# Altium PCB PCB CO_Dhani.PcbDoc
Units mil, origin at the board's own origin, x right, y up, seen from the top; angles counter-clockwise.
Board outline 6000 x 5500 mil, 2 copper layers (TopLayer, BottomLayer); 30 components, 0 nets, 266 pads, 0 vias.
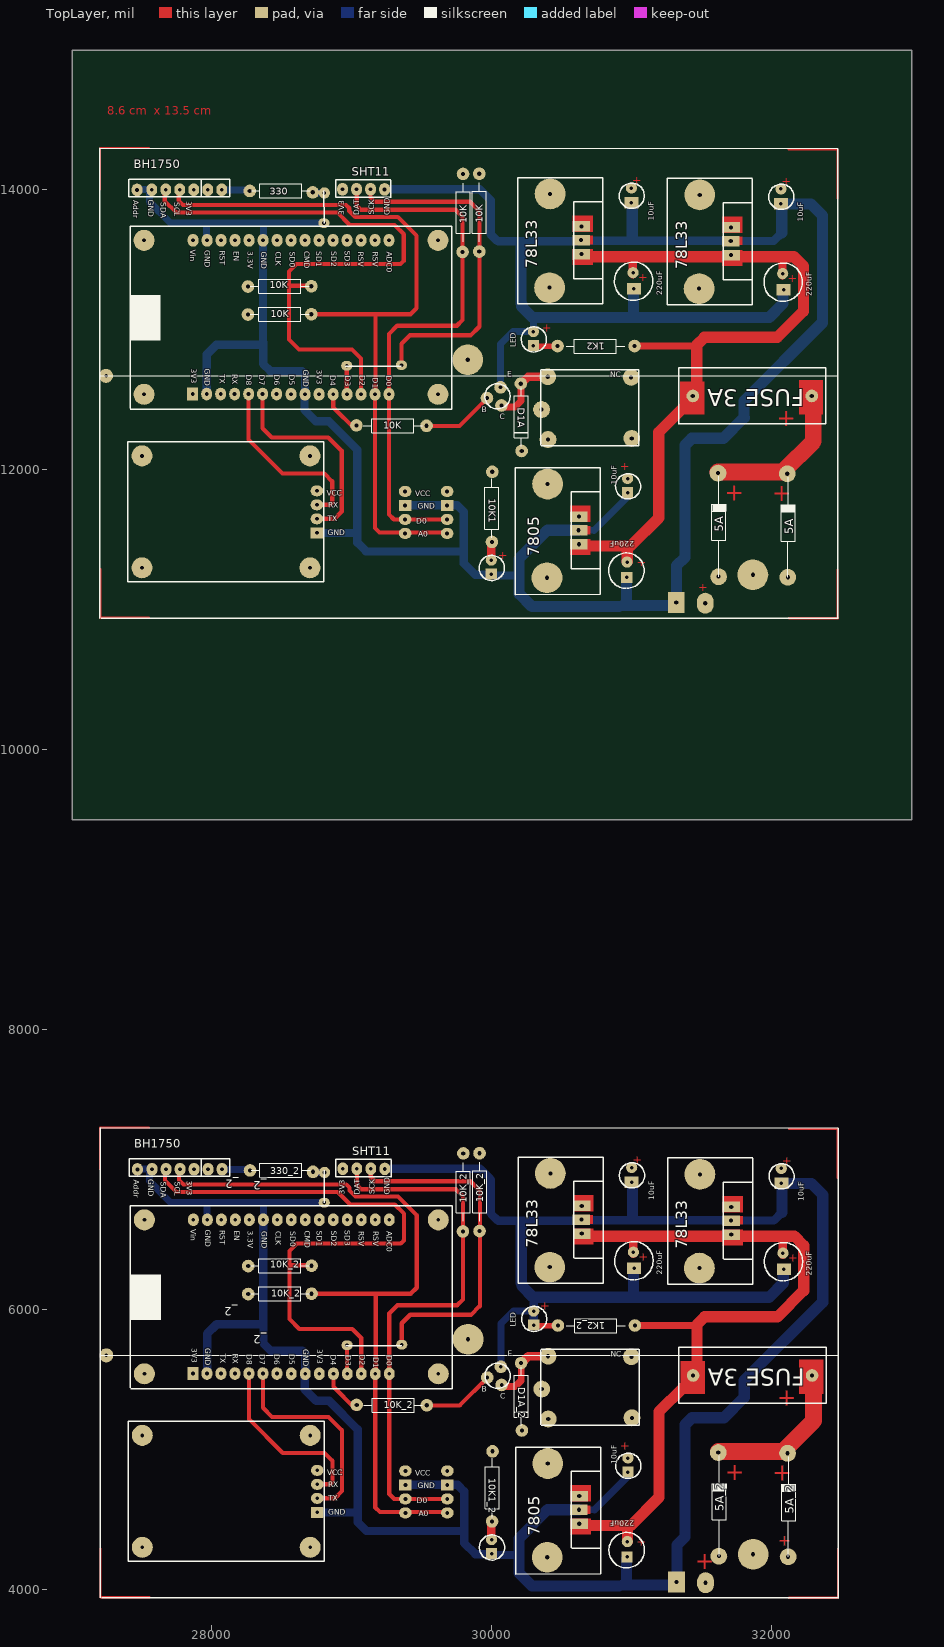
[diagram p0: TopLayer view]
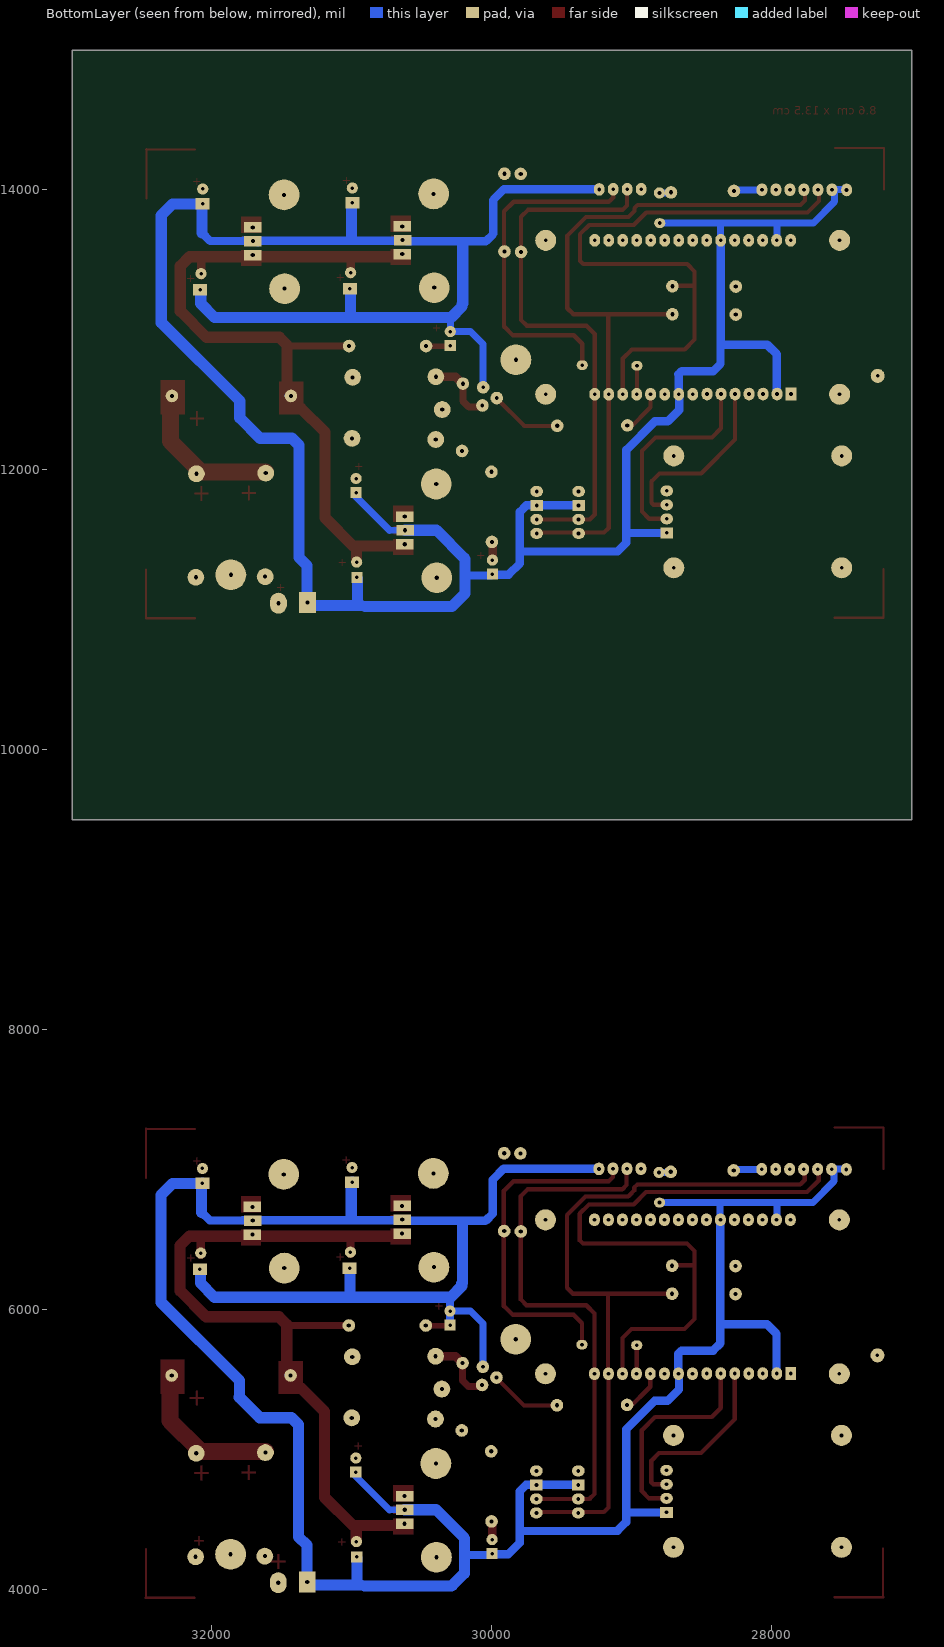
[diagram p1: BottomLayer view, seen from below]

## Layer stack, top to bottom
TopSolder: solder mask 0.4, Solder Resist, Dk 3.5
TopLayer: signal copper 1.4
Dielectric1: dielectric 12.6, FR-4, Dk 4.8
BottomLayer: signal copper 1.4
BottomSolder: solder mask 0.4, Solder Resist, Dk 3.5

## Board outline
27000,15000 33000,15000 33000,9500 27000,9500

## Design rules (kind name [scope] priority, off if disabled: settings)
Clearance [All] p1: gap=25
FabricationTestPointUsage TestPointUsage [All] p1: valid=0 allowmultiple=FALSE
FabricationTestpoint Testpoint [All] p1: side=3 testpointundercomponent=TRUE minsize=40 maxsize=100 preferedsize=60 minholesize=20 maxholesize=40 preferedholesize=32 testpointgrid=1 allowsidetop=TRUE allowsidebottom=TRUE usegrid=TRUE gridtolerance=0.01
PolygonConnect [All] p1: connectstyle=Relief reliefconductorwidth=10 reliefentries=4 polygonreliefangle="90 Angle" airgapwidth=10
RoutingVias [All] p1: holewidth=28 width=50 viastyle="Through Hole" minholewidth=28 minwidth=50 maxholewidth=28 maxwidth=50
ShortCircuit [All] p1: allowed=TRUE
SilkToSolderMaskClearance SilkscreenOverComponentPads [IsPad] p1: minsilkscreentomaskgap=10 clearancetoexposedcopper=TRUE
SolderMaskExpansion [All] p1: expansion=4
Width [All] p1: maxlimit=10 minlimit=10 preferedwidth=10
26 further rules are at their usual default settings.

## Components (designator, comment, footprint, x,y, rotation, side; value= is the part's Value field where it differs from the comment)
1K2 "Comment" AXIAL-0.5#1 30740,12885 r180 top
1K2_2 "Comment" AXIAL-0.5#1 30742,5886 r180 top
5A "Comment" DIODE-0.4 31623,11626 r90 top
5A "Comment" DIODE-0.4 32118,11621 r90 top
5A_2 "Comment" DIODE-0.4 32120,4622 r90 top
5A_2 "Comment" DIODE-0.4 31625,4627 r90 top
10K "Comment" AXIAL-0.5#2 29292,12315 r0 top
10K "Comment" AXIAL-0.5#3 29910,13840 r90 top
10K "Comment" AXIAL-0.5#4 29794,13839 r90 top
10K "Comment" AXIAL-0.5#5 28484,13112 r0 top
10K "Comment" AXIAL-0.5#5 28484,13312 r0 top
10K1 "Comment" AXIAL-0.5#2 30000,11726 r270 top
10K1_2 "Comment" AXIAL-0.5#2 30002,4727 r270 top
10K_2 "Comment" AXIAL-0.5#5 28486,6313 r0 top
10K_2 "Comment" AXIAL-0.5#5 28486,6113 r0 top
10K_2 "Comment" AXIAL-0.5#4 29796,6840 r90 top
10K_2 "Comment" AXIAL-0.5#3 29912,6841 r90 top
10K_2 "Comment" AXIAL-0.5#2 29294,5316 r0 top
330 "Comment" AXIAL-0.5#6 28490,13993 r0 top
330_2 "Comment" AXIAL-0.5#6 28492,6994 r0 top
_2 "" SIP8#1 28220,5722 r0 top
_2 "" SIP8#1 28224,6635 r0 top
_2 "" SIP8#2 28427,6621 r0 top
_2 "" SIP8#3 28424,5523 r0 top
D1A "Comment" AXIAL-0.5#7 30209,12378 r270 top
D1A_2 "Comment" AXIAL-0.5#7 30211,5379 r270 top
? "" SIP8#3 28422,12522 r0 top
? "" SIP8#2 28425,13620 r0 top
? "" SIP8#1 28222,13634 r0 top
? "" SIP8#1 28218,12721 r0 top

## Footprints (in the part's own frame and the unit in brackets; to place one, negate y for a bottom-side part, rotate by r counter-clockwise, add the part's x,y. Pads: shape width x height; smd on the part's side, far side on the other; paste and mask are expansions set on the pad)
AXIAL-0.5#1 [mil]
  round 90 hole 30: 1(-280,0) 2(270,0)
  silkscreen extent -210,-50 210,50
AXIAL-0.5#2 [mil]
  round 90 hole 30: 1(-260,3) 2(241,0)
  silkscreen extent -210,-50 210,50
AXIAL-0.5#3 [mil]
  round 90 hole 30: 1(-280,0) 2(276,0)
  silkscreen extent -210,-50 210,50
AXIAL-0.5#4 [mil]
  round 90 hole 30: 1(-282,3) 2(276,0)
  silkscreen extent -210,-50 210,50
AXIAL-0.5#5 [mil]
  round 90 hole 30: 1(-227,-2) 2(226,0)
  silkscreen extent -210,-50 210,50
AXIAL-0.5#6 [mil]
  round 90 hole 30: 1(-220,0) 2(230,-10)
  silkscreen extent -210,-50 210,50
AXIAL-0.5#7 [mil]
  round 90 hole 30: 1(-238,-2) 2(243,4)
  silkscreen extent -210,-50 210,50
DIODE-0.4 [mil]
  round 120 hole 30: 1(-389,3) 2(351,7)
  silkscreen extent -389,-50 327,50
SIP8#1 [mil]
SIP8#2 [mil]
  oval 77.5x90 hole 27: 1(840,20) 2(140,20) 3(240,20) 4(340,20) 5(440,20) 6(540,20) 7(640,20) 8(740,20)
SIP8#3 [mil]
  oval 77.5x90 hole 27: 1(843,18) 2(143,18) 3(243,18) 4(343,18) 6(543,18) 7(643,18) 8(743,18)

## Free pads (board coordinates)
  oval 77.5x90 hole 27: 0(27465,14000) 0(27467,7001) 0(27570,14002) 0(27572,7003) 0(27670,14002) 0(27672,7003) 0(27770,14002) 0(27772,7003) 0(27865,13640) 0(27867,6641) 0(27870,14002) 0(27872,7003) 0(27962,12542) 0(27964,5543) 0(27965,13640) 0(27967,6641) 0(27970,14001) 0(27972,7002) 0(28062,12542) 0(28064,5543) 0(28065,13640) 0(28067,6641) 0(28070,14001) 0(28072,7002) 0(28162,12542) 0(28164,5543) 0(28165,13640) 0(28167,6641) 0(28262,12542) 0(28264,5543) 0(28265,13640) 0(28267,6641) 0(28362,12542) 0(28364,5543) 0(28365,13640) 0(28367,6641) 0(28462,12542) 0(28464,5543) 0(28465,13640) 0(28467,6641) 0(28866,12540) 0(28868,5541) 0(28933,14005) 0(28935,7006) 0(29033,14005) 0(29035,7006) 0(29133,14005) 0(29135,7006) 0(29233,14004) 0(29235,7005)
  round 150 hole 27: 0(27500,11300) 0(27500,12100) 0(27502,4301) 0(27502,5101) 0(27515,12540) 0(27515,13640) 0(27517,5541) 0(27517,6641) 0(28700,11300) 0(28700,12100) 0(28702,4301) 0(28702,5101) 0(29615,12540) 0(29615,13640) 0(29617,5541) 0(29617,6641)
  rect 77.5x90 hole 27: 0(27862,12542) 0(27864,5543)
  rect 90x77.5 hole 27: 0(28750,11550) 0(28752,4551) 0(29380,11746) 0(29382,4747) 0(29680,11746) 0(29682,4747)
  oval 90x77.5 hole 27: 0(28750,11650) 0(28750,11750) 0(28750,11850) 0(28752,4651) 0(28752,4751) 0(28752,4851) 0(29380,11546) 0(29380,11646) 0(29380,11846) 0(29382,4547) 0(29382,4647) 0(29382,4847) 0(29680,11546) 0(29680,11646) 0(29680,11846) 0(29682,4547) 0(29682,4647) 0(29682,4847)
  oval 80x70 hole 27: 0(28800,13763) 0(28802,6764) 0(28963,12744) 0(28965,5745) 0(29354,12748) 0(29356,5749)
  round 80 hole 27: 0(28803,13979) 0(28805,6980)
  round 220 hole 30: 0(29828,12787) 0(29830,5788) 0(30394,11229) 0(30396,4230) 0(30398,11899) 0(30400,4900) 0(30412,13302) 0(30414,6303) 0(30416,13972) 0(30418,6973) 0(31481,13295) 0(31483,6296) 0(31485,13965) 0(31487,6966) 0(31865,11250) 0(31867,4251)
  round 90 hole 27: 0(29965,12513) 0(29967,5514) 0(30062,12590) 0(30064,5591) 0(30068,12460) 0(30070,5461)
  rect 80x80 hole 25: 0(29996,11255) 0(29998,4256) 0(30297,12888) 0(30299,5889) 0(30964,11231) 0(30966,4232) 0(30970,11838) 0(30972,4839)
  round 120 hole 30: 0(30355,12431) 0(30357,5432) 0(30400,12666) 0(30401,12217) 0(30402,5667) 0(30403,5218) 0(30995,12661) 0(30997,5662) 0(30999,12225) 0(31001,5226)
  rect 100x80 hole 25: 0(30997,13908) 0(30999,6909) 0(31015,13294) 0(31017,6295) 0(32066,13901) 0(32068,6902) 0(32084,13287) 0(32086,6288)
  rect 120x150 hole 30: 0(31317,11053) 0(31319,4054)
  oval 120x150 hole 30: 0(31525,11047) 0(31527,4048)
  round 100 hole 25: 1(27243,12672) 1(27245,5673)
  round 80 hole 25: 1(29996,11355) 1(29998,4356) 1(30297,12988) 1(30299,5989) 1(30966,11341) 1(30968,4342) 1(30970,11938) 1(30972,4939) 1(30997,14014) 1(30999,7015) 1(31009,13409) 1(31011,6410) 1(32066,14007) 1(32068,7008) 1(32078,13402) 1(32080,6403)
  rect 125x75 hole 30: 1(30622,11469) 1(30624,4470) 1(30640,13542) 1(30642,6543) 1(31709,13535) 1(31711,6536) 2(30620,11569) 2(30622,4570) 2(30638,13642) 2(30640,6643) 2(31707,13635) 2(31709,6636) 3(30622,11666) 3(30624,4667) 3(30640,13739) 3(30642,6740) 3(31709,13732) 3(31711,6733)
  round 90 hole 30: 8(32286,12528) 8(32288,5529) 9(31436,12528) 9(31438,5529)

## Nets (pads, with @x,y where several pads share a name; then routed paths per layer and width w, separated by ;. In a path a pad name is that pad's centre, name@x,y a point inside that pad or via, vN(x,y) a via of type N, cw(c..) or ccw(c..) an arc to the next point about the centre after c; other vN are vias at no path point)
pads on no net: 1K2.1 1K2.2 1K2_2.1 1K2_2.2 5A.1 5A.2 5A_2.1 5A_2.2 10K1.1 10K1.2 10K1_2.1 10K1_2.2 10K.1 10K.2 10K_2.1 10K_2.2 330.1 330.2 330_2.1 330_2.2 ?.1 ?.2 ?.3 ?.4 ?.5 ?.6 ?.7 ?.8 _2.1 _2.2 _2.3 _2.4 _2.5 _2.6 _2.7 _2.8 D1A.1 D1A.2 D1A_2.1 D1A_2.2
copper on no net: | length 102412
  TopLayer w15: 27199,14002 27199,14299 27549,14299 ; 27201,7003 27201,7300 27551,7300 ; 27201,10943 27551,10943 ; 27202,10941 27202,11291 ; 27203,3944 27553,3944 ; 27204,3942 27204,4292 ; 32120,14289 32470,14289 ; 32122,7290 32472,7290 ; 32122,10940 32472,10940 ; 32124,3941 32474,3941 ; 32469,13941 32469,14291 ; 32470,10939 32470,11289 ; 32471,6942 32471,7292 ; 32472,3940 32472,4290
  TopLayer w30: 27662,14002 27662,13922 27745.37,13838.63 ; 27664,7003 27664,6923 27747.37,6839.63 ; 27745.74,13839 28020,13839 ; 27747.74,6840 28022,6840 ; 27762,14002 27762,13925 27790.55,13896.45 27794,13893 27973.5,13893 ; 27764,7003 27764,6926 27792.55,6897.45 27796,6894 27975.5,6894 ; 27961,13893 28958,13893 28981,13870 28981,13849 29016.98,13813.02 ; 27963,6894 28960,6894 28983,6871 28983,6850 29018.98,6814.02 ; 27965,13640 27970,13645 ; 27967,6641 27972,6646 ; 28004,13839 28897,13839 ; 28006,6840 28899,6840 ; 28262,12542 28262,12216 28504,11974 28803,11974 28859,11918 28859,11765 28844,11750 28750,11750 ; 28264,5543 28264,5217 28506,4975 28805,4975 28861,4919 28861,4766 28846,4751 28752,4751 ; 28362,12542 28362,12297 28427,12232 28831,12232 28927,12136 28927,11702 28875,11650 28750,11650 ; 28364,5543 28364,5298 28429,5233 28833,5233 28929,5137 28929,4703 28877,4651 28752,4651 ; 28554,13315 28699,13315 ; 28556,6316 28701,6316 ; 28710,13112 29418,13112 29461,13155 29461,13673.5 ; 28712,6113 29420,6113 29463,6156 29463,6674.5 ; 28866,12540 28866,12447 29021,12292 ; 28868,5541 28868,5448 29023,5293 ; 28897,13838 28983.5,13751.5 28985,13750 29304,13750 29370,13684 29370,13492 ; 28899,6839 28985.5,6752.5 28987,6751 29306,6751 29372,6685 29372,6493 ; 28963,12530 28963,12744 ; 28965,5531 28965,5745 ; 29002.25,13827.75 29024,13806 29328,13806 29460.5,13673.5 ; 29004.25,6828.75 29026,6807 29330,6807 29462.5,6674.5 ; 29035,13995 29035,13889 29066,13858 29374,13858 29742,13858 29791,13809 29791,13719 29791,13071 29749.4,13029.4 ; 29037,6996 29037,6890 29068,6859 29376,6859 29744,6859 29793,6810 29793,6720 29793,6072 29751.4,6030.4 ; 29065,12540 29065,12795 29000,12860 28622,12860 28551,12931 28551,13417 28604,13470 29347,13470 29369,13492 ; 29067,5541 29067,5796 29002,5861 28624,5861 28553,5932 28553,6418 28606,6471 29349,6471 29371,6493 ; 29133,14006 29133,13947 29158,13922 ; 29135,7007 29135,6948 29160,6923 ; 29165,12540 29165,11585 29198,11552 29700,11552 ; 29165,13916 29803,13916 ; 29167,5541 29167,4586 29200,4553 29702,4553 ; 29167,6917 29805,6917 ; 29168,12540 29168,13112 ; 29170,5541 29170,6113 ; 29299,11646 29680,11646 ; 29299,11647 29265,11681 29265,12540 29265,12971 29323.4,13029.4 29331,13029.4 29750,13029.4 ; 29301,4647 29682,4647 ; 29301,4648 29267,4682 29267,5541 29267,5972 29325.4,6030.4 29333,6030.4 29752,6030.4 ; 29354,12748 29354,12901 29415,12962 29848,12962 ; 29356,5749 29356,5902 29417,5963 29850,5963 ; 29529,12299 29543,12313 29768,12313 29965,12510 ; 29531,5300 29545,5314 29770,5314 29967,5511 ; 29681,13916 29787,13916 ; 29683,6917 29789,6917 ; 29774,13916 29844,13916 29912.47,13847.53 29912.47,13023 ; 29776,6917 29846,6917 29914.47,6848.53 29914.47,6024 ; 29848,12961 29910,13023 ; 29850,5962 29912,6024 ; 30649,11461 30650,11460 ; 30651,4462 30652,4461 ; 30667,13534 30668,13533 ; 30669,6535 30670,6534 ; 30960,11359 30978,11341 ; 30962,4360 30980,4342 ; 31736,13527 31737,13526 ; 31738,6528 31739,6527
  TopLayer w40: 30295,12882 30470,12882 ; 30297,5883 30472,5883 ; 32234,12518.13 32302,12518.13 ; 32236,5519.13 32304,5519.13
  TopLayer w50: 30055,12449 30165,12449 30208,12492 30208,12623 ; 30057,5450 30167,5450 30210,5493 30210,5624 ; 30622,11666 30678,11666 ; 30624,4667 30680,4667 ; 31020,12885 31462,12885 ; 31022,5886 31464,5886
  TopLayer w60: 29995,11364 29995,11472 ; 29997,4365 29997,4473 ; 30208,12615 30258,12665 30416,12665 ; 30210,5616 30260,5666 30418,5666 ; 31008,13397 31008,13523 ; 31010,6398 31010,6524 ; 32077,13390 32077,13516 ; 32079,6391 32079,6517
  TopLayer w80: 30638,11456 30991,11456 31193,11658 31193,12269 31366,12442 ; 30640,4457 30993,4457 31195,4659 31195,5270 31368,5443 ; 30648,13523 32159,13523 32226,13456 32226,13134 32039,12947 31518,12947 31464,12893 31464,12499 ; 30650,6524 32161,6524 32228,6457 32228,6135 32041,5948 31520,5948 31466,5894 31466,5500 ; 30967,11347 30967,11438 ; 30969,4348 30969,4439
  TopLayer w120: 31616,11984 32084,11984 ; 31618,4985 32086,4985 ; 32084,11991 32297,12204 32297,12527 ; 32086,4992 32299,5205 32299,5528
  BottomLayer w40: 29995.46,11255.54 30006,11245 ; 29997.46,4256.54 30008,4246 ; 30298.46,5889.54 30299,5889 ; 30969.46,11838.54 30970,11838 ; 30971.46,4839.54 30972,4839 ; 31445,12513.13 31460.87,12529 ; 31447,5514.13 31462.87,5530
  BottomLayer w50: 27489,14003 27559,14003 ; 27491,7004 27561,7004 ; 27552,13993 27552,13916 27703,13765 28113,13765 ; 27554,6994 27554,6917 27705,6766 28115,6766 ; 27962,13648 27962,13739 ; 27964,6649 27964,6740 ; 28070,13998 28259,13998 ; 28072,6999 28261,6999 ; 28072,13765 28798,13765 ; 28074,6766 28800,6766 ; 28367,13660 28367,13758 ; 28369,6661 28369,6759 ; 28712,13979 28803,13979 ; 28714,6980 28805,6980 ; 30062,12590 30062,12898 30152,12988 30297,12988 30297,13096 ; 30064,5591 30064,5899 30154,5989 30299,5989 ; 30620,11569 30731,11568 ; 30622,4570 30733,4569 ; 30737,11574 30976,11813 ; 30739,4575 30978,4814
  BottomLayer w60: 27964,12555 27964,12826 28032,12894 28365,12894 28365,13640 ; 27966,5556 27966,5827 28034,5895 28367,5895 28367,6641 ; 28366,12913 28366,12757 28417,12706 28643,12706 28667,12682 ; 28368,5914 28368,5758 28419,5707 28645,5707 28669,5683 ; 28661,12541 28661,12428 28743,12346 28836,12346 29039,12143 29039,11480 29100,11419 ; 28663,5542 28663,5429 28745,5347 28838,5347 29041,5144 29041,4481 29102,4420 ; 28665,12540 28665,12681 ; 28667,5541 28667,5682 ; 28750,11550 29032.98,11549.1 ; 28752,4551 29034.98,4550.1 ; 29099.83,11418.2 29790,11416 ; 29101.83,4419.2 29792,4417 ; 29244,14006 29913,14006 29987.5,13931.5 ; 29246,7007 29915,7007 29989.5,6932.5 ; 29380,11746 29746,11746 29754,11746 29800,11700 29800,11331 29880,11251 30000,11251 ; 29382,4747 29748,4747 29756,4747 29802,4701 29802,4332 29882,4252 30002,4252 ; 29991,13689 29991,13926 ; 29992,13683 30038,13637 30041,13637 30045,13633 30213,13633 ; 29993,6690 29993,6927 ; 29994,6684 30040,6638 30043,6638 30047,6634 30215,6634 ; 30006,11245 30193,11245 30203,11255 ; 30008,4246 30195,4246 30205,4256 ; 30210,13633 30608,13633 ; 30212,6634 30610,6634 ; 30297,12888 30306,12897 ; 30299,5901 30299,6068 ; 30613,13638 31776,13638 ; 30615,6639 31778,6639 ; 31672,13626 31681,13635 32013,13635 32072,13694 ; 31674,6627 31683,6636 32015,6636 32074,6695
  BottomLayer w80: 30193,11116 30193,11362 30198,11367 30198,11371 30389,11562 ; 30195,4117 30195,4363 30200,4368 30200,4372 30391,4563 ; 30196,11112 30281.5,11026.5 30283.5,11026.5 30287,11023 30907,11023 ; 30198,4113 30283.5,4027.5 30285.5,4027.5 30289,4024 30909,4024 ; 30208,13615 30208,13189 30213,13184 30213,13167 30290,13090 ; 30210,6616 30210,6190 30215,6185 30215,6168 30292,6091 ; 30306,13087 31982,13090 32080,13188 32080,13282 ; 30312,6088 31981,6088 ; 30398,11569 30620,11569 ; 30400,4570 30622,4570 ; 30933,11030 31307,11030 ; 30935,4031 31309,4031 ; 30961,11040 30961,11223 ; 30963,4041 30963,4224 ; 30996,13908 30997,13908 ; 30998,6909 30999,6909 ; 31003,13668 31003,13889 ; 31005,6669 31005,6890 ; 31011,13107 31011,13289 ; 31013,6108 31013,6290 ; 31320,11037 31320,11316 31379,11375 31379,12176 31429,12226 31656,12226 31803,12373 ; 31322,4038 31322,4317 31381,4376 31381,5177 31431,5227 31658,5227 31805,5374 ; 31801,12370 31801,12491 32361,13051 ; 31803,5371 31803,5492 32363,6052 ; 31984,6091 32082,6189 32082,6283 ; 32065,13901 32066,13901 ; 32066,13899 32281,13899 32363,13817 32363,13051 ; 32067,6902 32068,6902 ; 32068,6900 32283,6900 32365,6818 32365,6052 ; 32072,13694 32072,13882 ; 32074,6695 32074,6883

## Other copper
TopLayer:
  region: 30722,13673 30583,13673 30583,13612 30722,13612
  region: 30723,13817 30577,13817 30577,13701 30723,13701
  region: 30723,13579 30577,13579 30577,13463 30723,13463
  region: 32367,12642 32194,12642 32194,12395 32367,12395
  region: 31521,12630 31346,12630 31346,12395 31521,12395
  region: 30704,11600 30565,11600 30565,11539 30704,11539
  region: 30705,11744 30559,11744 30559,11628 30705,11628
  region: 30705,11506 30559,11506 30559,11390 30705,11390
  region: 31792,13572 31646,13572 31646,13456 31792,13456
  region: 31792,13810 31646,13810 31646,13694 31792,13694
  region: 31791,13666 31652,13666 31652,13605 31791,13605
  region: 31793,6667 31654,6667 31654,6606 31793,6606
  region: 31794,6811 31648,6811 31648,6695 31794,6695
  region: 31794,6573 31648,6573 31648,6457 31794,6457
  region: 30707,4507 30561,4507 30561,4391 30707,4391
  region: 30707,4745 30561,4745 30561,4629 30707,4629
  region: 30706,4601 30567,4601 30567,4540 30706,4540
  region: 31523,5631 31348,5631 31348,5396 31523,5396
  region: 32369,5643 32196,5643 32196,5396 32369,5396
  region: 30725,6580 30579,6580 30579,6464 30725,6464
  region: 30725,6818 30579,6818 30579,6702 30725,6702
  region: 30724,6674 30585,6674 30585,6613 30724,6613
  text "8.6 cm  x 13.5 cm" at 27251,14539 h60
  text "+" at 31071,14090 h60 r180
  text "+" at 32140,14083 h60 r180
  text "+" at 31046,13348 h60
  text "+" at 32115,13341 h60
  text "+" at 30429,13036 h60 r180
  text "+" at 32037,12420 h120 r180
  text "+" at 30985,12048 h60 r180
  text "+" at 31664,11888 h120 r180
  text "+" at 32004,11884 h120 r180
  text "+" at 30112,11413 h60 r180
  text "+" at 31034,11312 h60
  text "+" at 31474,11133 h60
  text "+" at 31073,7091 h60 r180
  text "+" at 32142,7084 h60 r180
  text "+" at 31048,6349 h60
  text "+" at 32117,6342 h60
  text "+" at 30412,6047 h60 r180
  text "+" at 32039,5421 h120 r180
  text "+" at 30987,5049 h60 r180
  text "+" at 31666,4889 h120 r180
  text "+" at 32006,4885 h120 r180
  text "+" at 31036,4313 h60
  text "+" at 32046,4312 h80
  text "+" at 31454,4253 h120 r180

## Silkscreen, mask and mechanical layers (free items; w line width, h text height)
TopOverlay:
  drawing of 158 lines, arcs and shapes, not listed
  text "BH1750" at 27441,14156 h60
  text "SHT11" at 29000,14100 h60
  text "GND" at 27543,13930 h40 r270
  text "Addr" at 27439,13928 h40 r270
  text "3V3" at 27817,13919 h40 r270
  text "SDA" at 27633,13913 h40 r270
  text "SCL" at 27732,13913 h40 r270
  text "SCK" at 29161,13824 h40 r90
  text "GND" at 29269,13821 h40 r90
  text "3V3" at 28947,13818 h40 r90
  text "DAT" at 29054,13818 h40 r90
  text "10uF" at 31157,13781 h40 r90
  text "10uF" at 32226,13774 h40 r90
  text "Vin" at 27846,13573 h40 r270
  text "GND" at 27950,13569 h40 r270
  text "SD3" at 28948,13565 h40 r270
  text "RST" at 28054,13564 h40 r270
  text "EN" at 28157,13562 h40 r270
  text "3.3V" at 28255,13562 h40 r270
  text "SD1" at 28745,13562 h40 r270
  text "CMD" at 28660,13561 h40 r270
  text "SD2" at 28852,13561 h40 r270
  text "GND" at 28352,13560 h40 r270
  text "CLK" at 28454,13559 h40 r270
  text "ADC0" at 29248,13559 h40 r270
  text "SD0" at 28557,13558 h40 r270
  text "RSV" at 29046,13558 h40 r270
  text "RSV" at 29149,13558 h40 r270
  text "78L33" at 30326,13441 h80 r90
  text "78L33" at 31395,13434 h80 r90
  text "220uF" at 31216,13247 h40 r90
  text "220uF" at 32285,13240 h40 r90
  text "LED" at 30170,12875 h40 r90
  text "GND" at 27949,12723 h40 r270
  text "3V3" at 27853,12722 h40 r270
  text "3V3" at 28750,12717 h40 r270
  text "GND" at 28651,12716 h40 r270
  text "TX" at 28056,12683 h40 r270
  text "RX" at 28145,12683 h40 r270
  text "D6" at 28444,12681 h40 r270
  text "D8" at 28245,12680 h40 r270
  text "D7" at 28338,12678 h40 r270
  text "D5" at 28552,12678 h40 r270
  text "D4" at 28846,12675 h40 r270
  text "D2" at 29055,12675 h40 r270
  text "D3" at 28953,12674 h40 r270
  text "D0" at 29247,12674 h40 r270
  text "E" at 30110,12666 h40
  text "NC" at 30846,12663 h40
  text "D1" at 29150,12659 h40 r270
  text "FUSE 3A" at 32232,12575 h120 r180
  text "B" at 29926,12412 h40
  text "C" at 30057,12363 h40
  text "10uF" at 30892,11894 h40 r90
  text "VCC" at 28821,11815 h40
  text "VCC" at 29451,11811 h40
  text "RX" at 28830,11728 h40
  text "GND" at 29469,11721 h40
  text "TX" at 28828,11634 h40
  text "D0" at 29460,11616 h40
  text "GND" at 28828,11532 h40
  text "A0" at 29474,11521 h40
  text "220uF" at 31016,11490 h40 r180
  text "7805" at 30339,11383 h80 r90
  text "BH1750" at 27443,7157 h60
  text "SHT11" at 29002,7101 h60
  text "GND" at 27545,6931 h40 r270
  text "Addr" at 27441,6929 h40 r270
  text "3V3" at 27819,6920 h40 r270
  text "SDA" at 27635,6914 h40 r270
  text "SCL" at 27734,6914 h40 r270
  text "SCK" at 29163,6825 h40 r90
  text "GND" at 29271,6822 h40 r90
  text "3V3" at 28949,6819 h40 r90
  text "DAT" at 29056,6819 h40 r90
  text "10uF" at 31159,6782 h40 r90
  text "10uF" at 32228,6775 h40 r90
  text "Vin" at 27848,6574 h40 r270
  text "GND" at 27952,6570 h40 r270
  text "SD3" at 28950,6566 h40 r270
  text "RST" at 28056,6565 h40 r270
  text "EN" at 28159,6563 h40 r270
  text "3.3V" at 28257,6563 h40 r270
  text "SD1" at 28747,6563 h40 r270
  text "CMD" at 28662,6562 h40 r270
  text "SD2" at 28854,6562 h40 r270
  text "GND" at 28354,6561 h40 r270
  text "CLK" at 28456,6560 h40 r270
  text "ADC0" at 29250,6560 h40 r270
  text "SD0" at 28559,6559 h40 r270
  text "RSV" at 29048,6559 h40 r270
  text "RSV" at 29151,6559 h40 r270
  text "78L33" at 30328,6442 h80 r90
  text "78L33" at 31397,6435 h80 r90
  text "220uF" at 31218,6248 h40 r90
  text "220uF" at 32287,6241 h40 r90
  text "LED" at 30172,5876 h40 r90
  text "GND" at 27951,5724 h40 r270
  text "3V3" at 27855,5723 h40 r270
  text "3V3" at 28752,5718 h40 r270
  text "GND" at 28653,5717 h40 r270
  text "TX" at 28058,5684 h40 r270
  text "RX" at 28147,5684 h40 r270
  text "D6" at 28446,5682 h40 r270
  text "D8" at 28247,5681 h40 r270
  text "D7" at 28340,5679 h40 r270
  text "D5" at 28554,5679 h40 r270
  text "D4" at 28848,5676 h40 r270
  text "D2" at 29057,5676 h40 r270
  text "D3" at 28955,5675 h40 r270
  text "D0" at 29249,5675 h40 r270
  text "E" at 30112,5667 h40
  text "NC" at 30848,5664 h40
  text "D1" at 29152,5660 h40 r270
  text "FUSE 3A" at 32234,5576 h120 r180
  text "B" at 29928,5413 h40
  text "C" at 30059,5364 h40
  text "10uF" at 30894,4895 h40 r90
  text "VCC" at 28823,4816 h40
  text "VCC" at 29453,4812 h40
  text "RX" at 28832,4729 h40
  text "GND" at 29471,4722 h40
  text "TX" at 28830,4635 h40
  text "D0" at 29462,4617 h40
  text "GND" at 28830,4533 h40
  text "A0" at 29476,4522 h40
  text "220uF" at 31018,4491 h40 r180
  text "7805" at 30341,4384 h80 r90
Mechanical1:
  lines w50: 27413,14117 27356,14060 27356,12386 27483,12259 28043,12259 28452,11850 28750,11850 ; 27415,7118 27358,7061 27358,5387 27485,5260 28045,5260 28454,4851 28752,4851 ; 27421,14117 30021,14117 ; 27423,7118 30023,7118 ; 27862,12542 27862,12997 27975,13110 28257,13110 ; 27864,5543 27864,5998 27977,6111 28259,6111 ; 27866,12262 27866,12560 ; 27868,5263 27868,5561 ; 27869,14002 27869,14092 ; 27871,7003 27871,7093 ; 27972,13992 27972,14088 ; 27974,6993 27974,7089 ; 28265,13105 28265,13640 ; 28267,6106 28267,6641 ; 28936,13999 28937,14103 ; 28938,7000 28939,7104 ; 30019,14118 30084,14053 30084,13771 30116,13739 30640,13739 ; 30021,7119 30086,7054 30086,6772 30118,6740 30642,6740 ; 30604.1,11680.01 30620.02,11696 ; 30606.1,4681.01 30622.02,4697 ; 30619.98,11664.06 30637,11681 ; 30621.98,4665.06 30639,4682 ; 30634,11937 30961,11937 ; 30636,4938 30963,4938 ; 30673,13795 30894,14016 ; 30675,6796 30896,7017 ; 30897,14018 31123,14018 31409,13732 31709,13732 ; 30899,7019 31125,7019 31411,6733 31711,6733 ; 31742,13788 31963,14009 ; 31744,6789 31965,7010 ; 31966,14011 32068,14011 ; 31968,7012 32070,7012
  lines w60: 29380,11846 29534,12000 30000,12000 ; 29382,4847 29536,5001 30002,5001 ; 29684,11850 30000,11850 30154,11696 30620.02,11696 ; 29686,4851 30002,4851 30156,4697 30622.02,4697 ; 30003,11986 30003,12242 30045,12284 ; 30005,4987 30005,5243 30047,5285 ; 30045,12285 30213,12285 ; 30047,5286 30215,5286 ; 30211,12136 30320,12136 30401,12217 ; 30213,5137 30322,5137 30403,5218 ; 30214,12287 30356,12431 ; 30216,5288 30358,5432 ; 30623,11666 30623,12135 ; 30625,4667 30625,5136 ; 30625.01,12138.99 30710.02,12224 31007,12224 ; 30627.01,5139.99 30712.02,5225 31009,5225
  lines w80: 31520,11028 32059,11028 32119,11088 32119,11240 ; 31522,4029 32061,4029 32121,4089 32121,4241 ; 31618,11047 31618,11207 31627,11216 ; 31620,4048 31620,4208 31629,4217